# Altium PCB Hi-Fi.PcbDoc
Units mil, origin at the board's own origin, x right, y up, seen from the top; angles counter-clockwise.
Board outline 5000 x 4000 mil, 4 copper layers (Top Layer, Internal Plane 1, Internal Plane 2, Bottom Layer), stack 18.2 mil thick; 38 components, 33 nets, 94 pads, 6 vias.
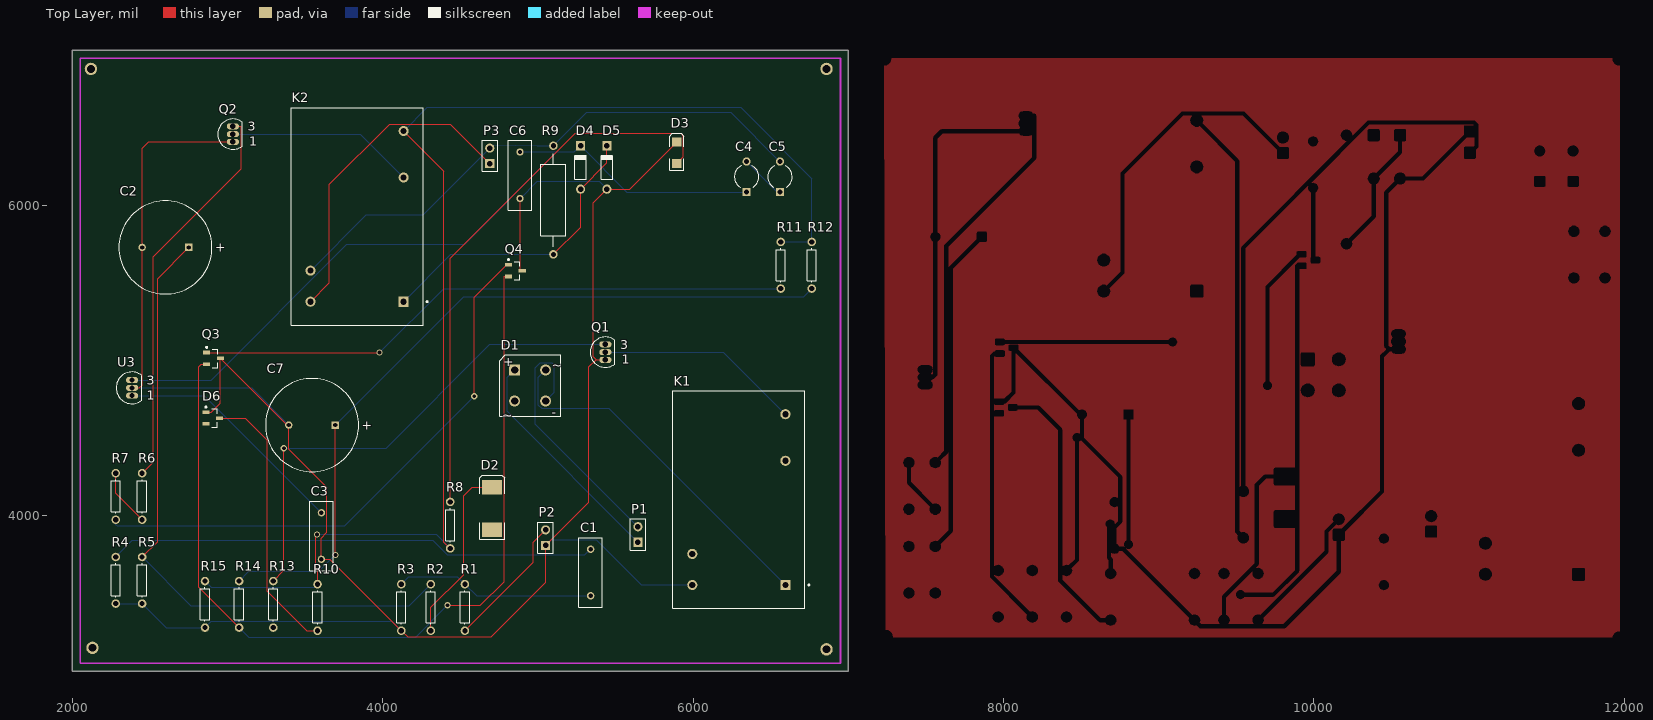
[diagram p0: Top Layer view]
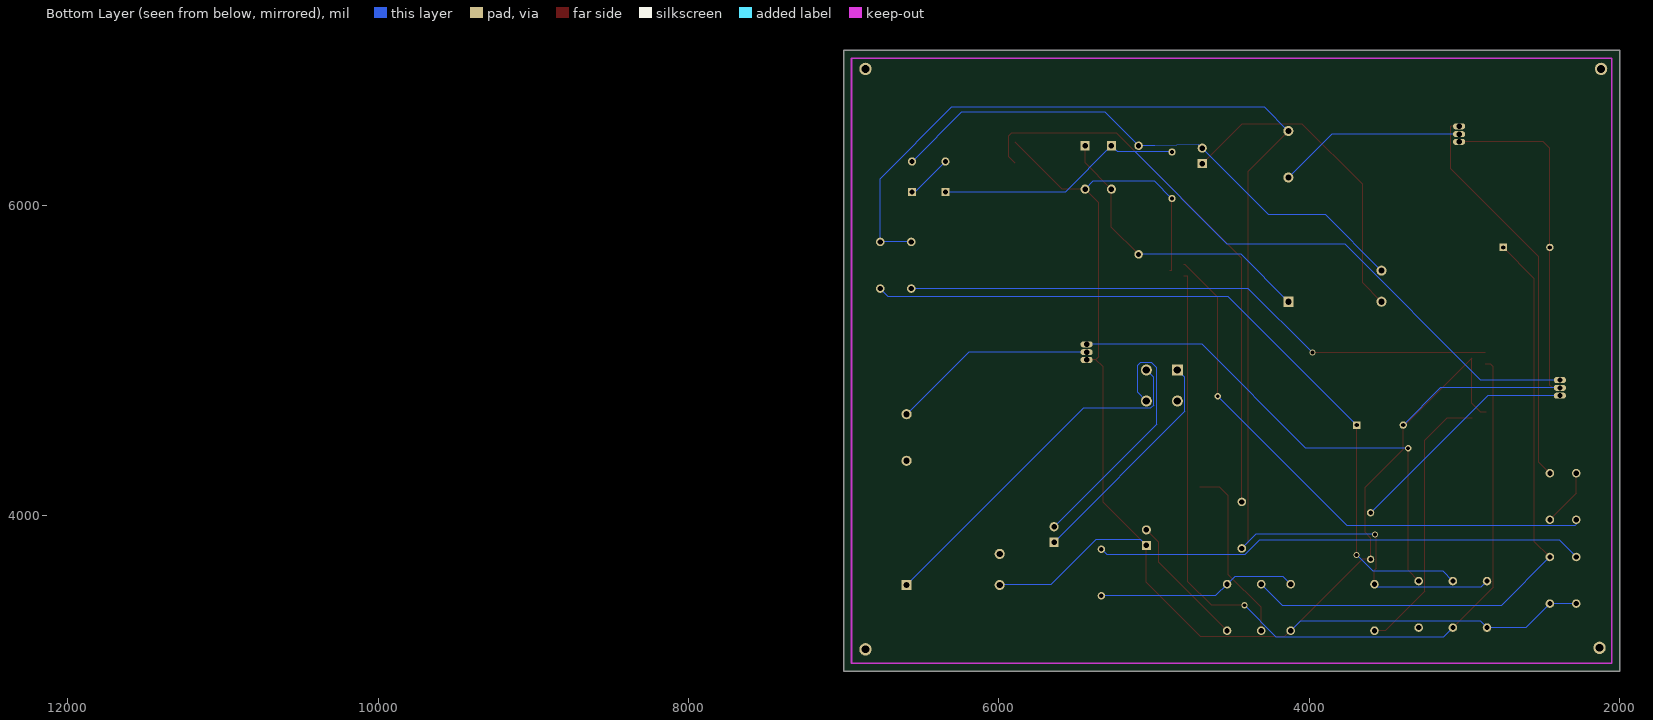
[diagram p1: Bottom Layer view, seen from below]
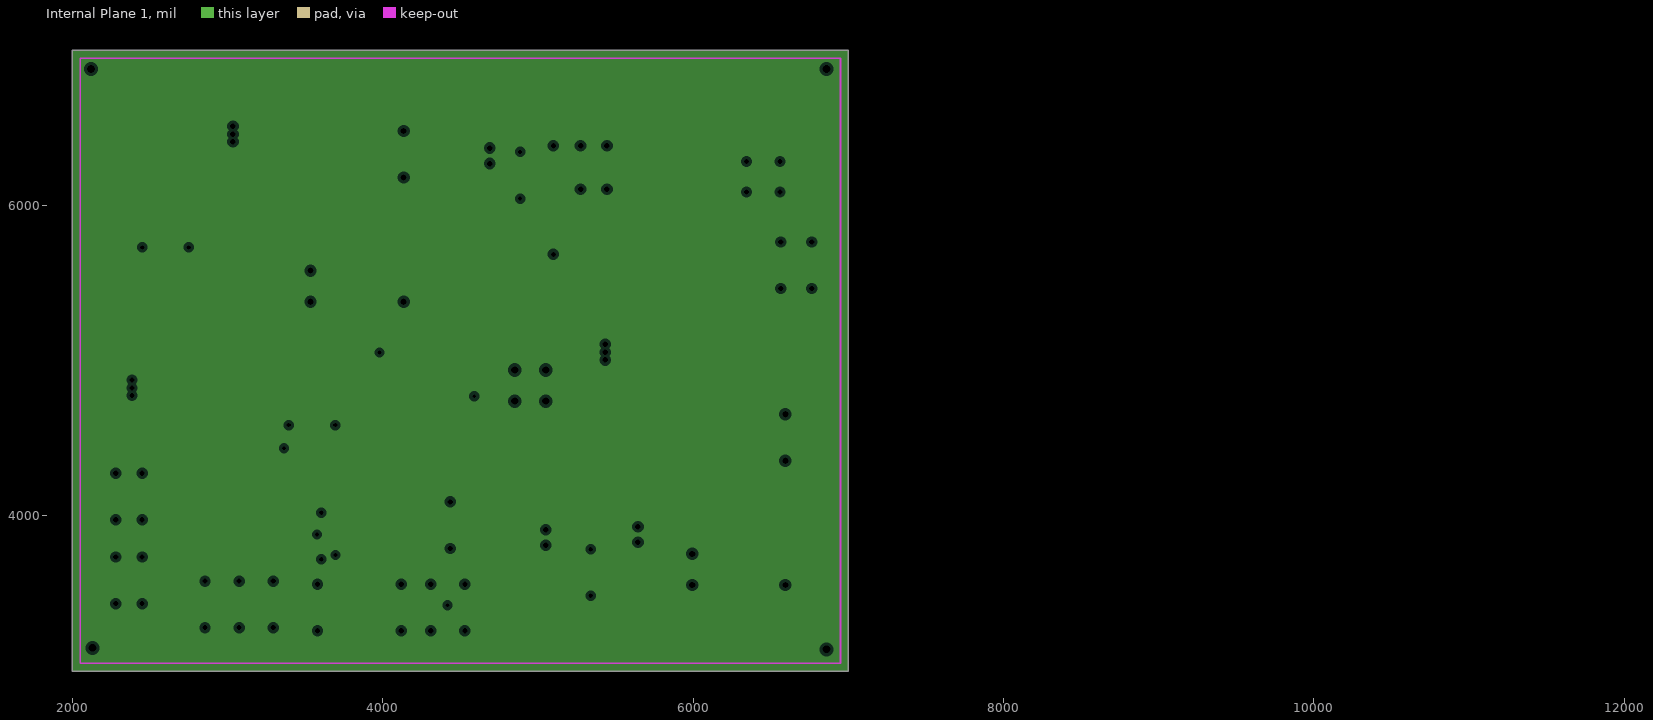
[diagram p2: Internal Plane 1, clearances drawn from the general rule]
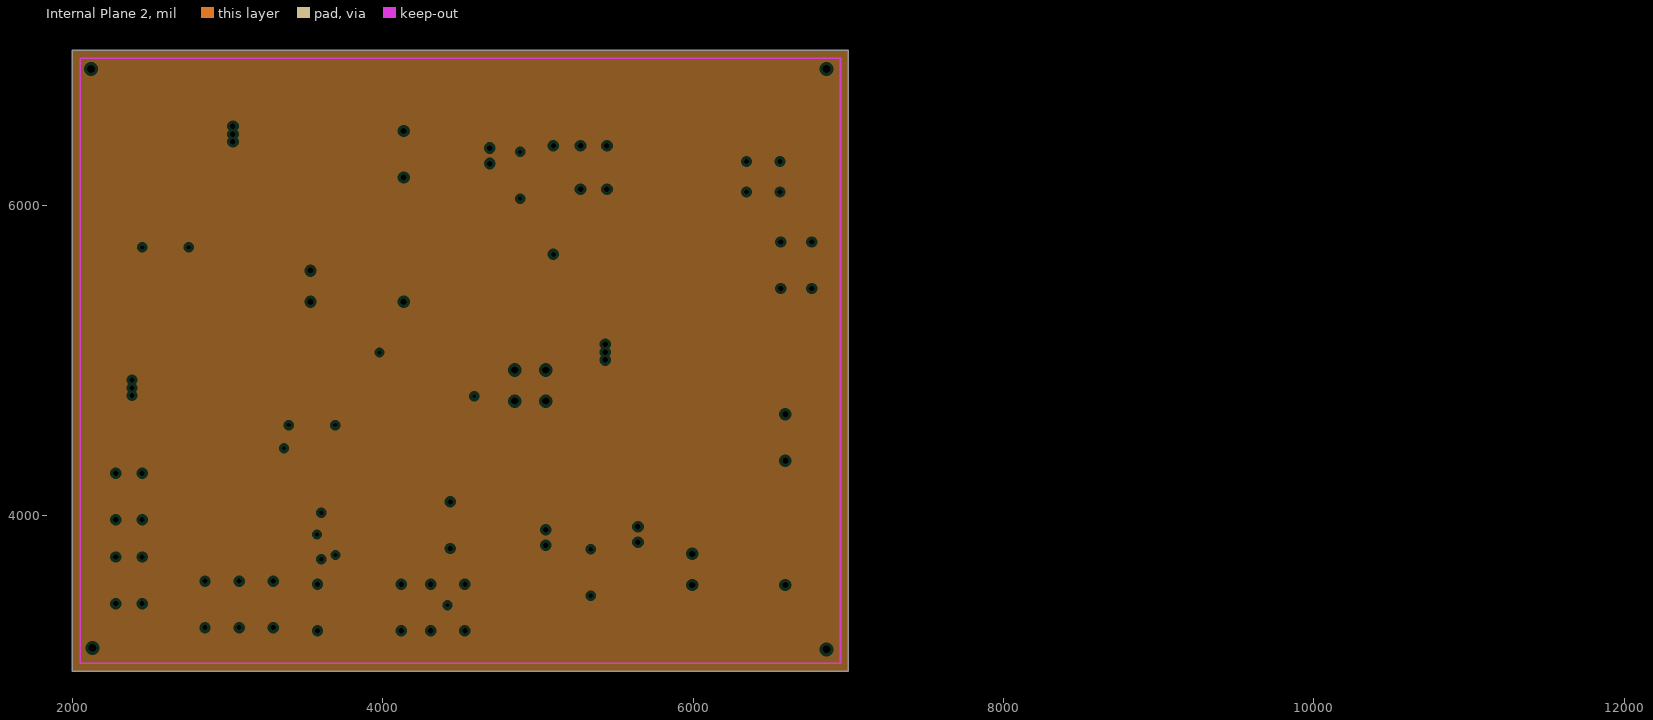
[diagram p3: Internal Plane 2, clearances drawn from the general rule]

## Layer stack, top to bottom
Top Solder: solder mask 0.4, Solder Resist, Dk 3.5
Top Layer: signal copper 1.4
Internal Plane 1: plane copper 1.4
Internal Plane 2: plane copper 1.4
Dielectric 1: dielectric 12.6, FR-4, Dk 4.8
Bottom Layer: signal copper 1.4
Bottom Solder: solder mask 0.4, Solder Resist, Dk 3.5

## Board outline
2000,3000 7000,3000 7000,7000 2000,7000

## Design rules (kind name [scope] priority, off if disabled: settings)
Clearance [All] p1: gap=8 ignorepadtopadclearanceinfootprint=FALSE
PlaneClearance [All] p1: clearance=20
PlaneConnect [All] p1: planeconnectstyle=Relief reliefexpansion=20 reliefentries=4 reliefconductorwidth=10 reliefairgap=10
PolygonConnect [All] p1: connectstyle=Relief reliefconductorwidth=10 reliefentries=4 polygonreliefangle="90 Angle" airgapwidth=10
RoutingVias [All] p1: holewidth=25 width=40 viastyle="Through Hole" minholewidth=28 minwidth=50 maxholewidth=28 maxwidth=50
SolderMaskExpansion [All] p1: expansion=4
Width [All] p1: maxlimit=8 minlimit=8 preferedwidth=8
28 further rules are at their usual default settings.

## Classes and differential pairs
component class "mini ": C7 D6 Q3 Q4 R10 R11 R12 R13 R14 R15 U4
component class mini6: C4 C5 C6 D4 D5 K2 P3 Q2 R9
component class mini5: C3 U3
component class mini4: D3 R6 R7 R8 U2
component class mini3: C1 C2 D2 P2 R1 R2 R3 R4 R5 U1
component class mini2: D1 K1 P1 Q1 V

## Components (designator, comment, footprint, x,y, rotation, side; value= is the part's Value field where it differs from the comment)
C1 "Cap" RAD-0.3 5340,3635 r90 top value=100pF
C2 "Cap Pol1" RB7.6-15 2600,5730 r0 top value=100pF
C3 "Cap" RAD-0.3 3605,3870 r90 top value=100pF
C4 "Cap2" CAPR5-4X5 6345,6185 r90 top value=100pF
C5 "Cap2" CAPR5-4X5 6560,6185 r90 top value=100pF
C6 "Cap" RAD-0.3 4885,6195 r90 top value=100pF
C7 "Cap Pol1" RB7.6-15 3545,4585 r0 top value=100uF
D1 "Bridge1" D-38 4950,4840 r0 top
D2 "Diode" SMC 4705,4048.19 r90 top
D3 "LED2" 3.2X1.6X1.1 5895,6340 r90 top
D4 "Diode 1N4448" DO-35 5275,6245 r90 top
D5 "Diode 1N4448" DO-35 5445,6245 r90 top
D6 "Diode BAS70" SOT-23_N 2905,4630 r0 top
K1 "Relay-SPDT" MODULE5B 6295,4105 r90 top
K2 "Relay-SPDT" MODULE5B 3835,5930 r90 top
P1 "Header 2" HDR1X2 5645,3830 r90 top
P2 "Header 2" HDR1X2 5050,3810 r90 top
P3 "Header 2" HDR1X2 4690,6270 r90 top
Q1 "BC368" TO-92A 5435,5055 r0 top
Q2 "BC368" TO-92A 3035,6460 r0 top
Q3 "BC807-16" SOT-23A_N 2910,5015 r0 top
Q4 "BC807-16" SOT-23A_N 4855,5580 r0 top
R1 "Res1" AXIAL-0.3 4530,3410 r90 top value=1K
R2 "Res1" AXIAL-0.3 4310,3410 r90 top value=1K
R3 "Res1" AXIAL-0.3 4120,3410 r90 top value=1K
R4 "Res1" AXIAL-0.3 2280,3585 r90 top value=1K
R5 "Res1" AXIAL-0.3 2450,3585 r90 top value=1K
R6 "Res1" AXIAL-0.3 2450,4125 r90 top value=47K
R7 "Res1" AXIAL-0.3 2280,4125 r90 top value=100K
R8 "Res1" AXIAL-0.3 4435,3940 r90 top value=1K
R9 "Res Adj1" AXIAL-0.7 5100,6035 r90 top value=1K
R10 "Res1" AXIAL-0.3 3580,3410 r90 top value=560K
R11 "Res1" AXIAL-0.3 6565,5615 r90 top value=100K
R12 "Res1" AXIAL-0.3 6765,5615 r90 top value=330K
R13 "Res1" AXIAL-0.3 3295,3430 r90 top value=22K
R14 "Res1" AXIAL-0.3 3075,3430 r90 top value=10K
R15 "Res1" AXIAL-0.3 2855,3430 r90 top value=10K
U3 "LM2931-5AQLP" LP03 2385,4825 r0 top

## Footprints (in the part's own frame and the unit in brackets; to place one, negate y for a bottom-side part, rotate by r counter-clockwise, add the part's x,y. Pads: shape width x height; smd on the part's side, far side on the other; paste and mask are expansions set on the pad)
3.2X1.6X1.1 [mm] "SMT LED; 2 Flat Leads"
  rect 1.5x1.5 smd: 1(-1.75,0) 2(1.75,0)
  silkscreen extent -2.9,-1.15 3.2,1.15
AXIAL-0.3 [mm] "Axial Device, Thru-Hole; 2 Leads; 0.3 in Pin Spacing"
  round 1.4 hole 0.85: 1(-3.81,0) 2(3.81,0)
  silkscreen extent -2.77,-0.76 2.77,0.76
AXIAL-0.7 [mm] "Axial Device, Thru-Hole; 2 Leads; 0.7 in Pin Spacing"
  round 1.4 hole 0.85: 1(-8.89,0) 2(8.89,0)
  silkscreen extent -7.62,-2.03 7.62,2.03
CAPR5-4X5 [mm] "Capacitor; 2 Leads"
  rect 1.35x1.35 hole 0.8: 1(-2.5,0)
  round 1.35 hole 0.8: 2(2.5,0)
  silkscreen extent -1.69,-2 1.82,2
D-38 [mm] "Bridge Rectifier; 4 Terminals; Body 9.4 x 9.4 mm (typ); Pitch 5.08 mm"
  rect 1.8x1.8 hole 1.2: 1(-2.54,2.54)
  round 1.8 hole 1.2: 2(-2.54,-2.54) 3(2.54,-2.54) 4(2.54,2.54)
  silkscreen extent -5,-5 5,5, body extent -5,-5 5,5, height 9.91
DO-35 [mm] "Diode, Axial; Body 3.8 x 1.9 mm (LxDia. max), Lead Dia. 0.53 mm (max)"
  round 1.5 hole 0.9: 1(-3.55,0)
  rect 1.5x1.5 hole 0.9: 2(3.55,0)
  silkscreen extent -1.95,-0.95 2.05,0.95
HDR1X2 [mm] "Connector; Header; 2 Position"
  rect 1.5x1.5 hole 0.9: 1(0,0)
  round 1.5 hole 0.9: 2(2.54,0)
  silkscreen extent -1.27,-1.27 3.81,1.27
LP03 [mm] "TO, Flat Index; 3 In-Line, Axial Leads; Body Dia. 4.8mm; Leads 0.56 x 0.41 mm (max)"
  oval 2x1 hole 0.8: 1(0,-1.27) 2(0,0) 3(0,1.27)
  silkscreen extent -2.6,-2.6 1.6,2.6
MODULE5B [mm] "DIP; 5 Round Pins; Row Space 15.24 mm; Pitch 2.54 mm"
  rect 1.65x1.65 hole 1: 1(-13.97,-7.62)
  round 1.65 hole 1: 2(-13.97,7.62) 3(-8.89,7.62) 4(13.97,-7.62) 5(6.35,-7.62)
  silkscreen extent -17.8,-11.58 17.8,10.8, body extent -17.8,-10.8 17.8,10.8, height 14
RAD-0.3 [mm] "Radial Cap, Thru-Hole; 2 Leads; 0.3 in Pin Spacing"
  round 1.2 hole 0.7: 1(-3.81,0) 2(3.81,0)
  silkscreen extent -5.71,-1.91 5.71,1.91
RB7.6-15 [mm] "Polarized Capacitor (Radial); 2 Leads"
  rect 1.2x1.2 hole 0.7: 1(3.81,0)
  round 1.2 hole 0.7: 2(-3.81,0)
  silkscreen extent -7.62,-7.62 7.62,7.62
SMC [mm] "DO-214-AB/SMC; 2 C-Bend Leads; Body 7.9 x 5.9 mm, inc. leads (LxW)"
  rect 2.4x3.3 smd: 1(-3.475,0) 2(3.475,0)
  silkscreen extent -5.07,-2.05 5.43,2.06
SOT-23_N [mm] "SOT23, 3-Leads, Body 2.9x1.3mm, Pitch 0.95mm, Lead Span 2.5mm, IPC Medium Density"
  rect 1.15x0.6 smd: 1(-1.125,0.95) 2(-1.125,-0.95) 3(1.125,0)
  silkscreen extent -1.25,-1.5 0.7,1.92, body extent -0.7,-1.5 0.7,1.5, height 1.1
SOT-23A_N [mm] "SOT23, 3-Leads, Body 2.9x1.3mm, Pitch 0.95mm, Lead Span 2.3mm, IPC Medium Density"
  rect 1.15x0.6 smd: 1(-1.125,0.95) 2(-1.125,-0.95) 3(1.125,0)
  silkscreen extent -1.25,-1.5 0.7,1.92, body extent -0.7,-1.5 0.7,1.5, height 1.09
TO-92A [mm] "TO, Flat Index; 3 In-Line, Axial Leads; Body Dia. 4.5mm; Leads 0.51 x 0.48 mm (max)"
  oval 2x1 hole 0.9: 1(0,-1.27) 2(0,0) 3(0,1.27)
  silkscreen extent -2.48,-2.48 1.5,2.48

## Part data
C1 C3 C4 C5 C6: "Capacitor", Publisher="Altium Limited"
  C1 C3 C6: LatestRevisionDate=17-Jul-2002, LatestRevisionNote="Re-released for DXP Platform.", PackageDescription="Radial Cap, Thru-Hole; 2 Leads; 0.3 in Pin Spacing", PackageReference=RAD-0.3, Published=8-Jun-2000
  C4 C5: PackageDescription="Capacitor; 2 Leads", PackageReference=CAPR5-4X5, Published=23-Sep-2002
C2 C7: "Polarized Capacitor (Radial)", LatestRevisionDate=17-Jul-2002, LatestRevisionNote="Re-released for DXP Platform.", PackageDescription="Polarized Capacitor (Radial); 2 Leads", PackageReference=RB7.6-15, Published=8-Jun-2000, Publisher="Altium Limited"
D1: "Full Wave Diode Bridge", DatasheetVersion=E2732B, LatestRevisionDate=29-May-2009, LatestRevisionNote="Sch pins A & K swapped.", PackageDescription="Bridge Rectifier; 4 Terminals; Body 9.4 x 9.4 mm (typ); Pitch 5.08 mm", PackageReference=D-38, Published=8-Jun-2000, Publisher="Altium Limited"
D2: "Default Diode", Code_JEDEC=DO-214-AB, LatestRevisionDate=17-Jul-2002, LatestRevisionNote="Re-released for DXP Platform.", PackageDescription="DO-214-AB/SMC; 2 C-Bend Leads; Body 7.9 x 5.9 mm, inc. leads (LxW)", PackageReference=SMC, PackageVersion=Sep-1996, Published=8-Jun-2000, Publisher="Altium Limited"
D3: "Typical RED, GREEN, YELLOW, AMBER GaAs LED", LatestRevisionDate=17-Jul-2002, LatestRevisionNote="Re-released for DXP Platform.", PackageDescription="SM LED; 2 Flat Leads", PackageReference=3.2X1.6X1.1, PackageVersion=Feb-2002, Published=8-Jun-2000, Publisher="Altium Limited"
D4 D5: "High Conductance Fast Diode", Code_JEDEC=DO-204-AH, ComponentLink1Description="Manufacturer Link", ComponentLink1URL=http://www.fairchildsemi.com/, ComponentLink2Description=Datasheet, ComponentLink2URL=http://www.fairchildsemi.com/ds/1N%2F1N4448.pdf, DatasheetVersion=1997, LatestRevisionDate=17-Jul-2002, LatestRevisionNote="Re-released for DXP Platform.", PackageDescription="Diode, Axial; Body 3.8 x 1.9 mm (LxDia. max), Lead Dia. 0.53 mm (max)", PackageReference=DO-35, Published=8-Jun-2000, Publisher="Altium Limited"
D6: "Silicon AF Schottky Diode for High-Speed Switching", ComponentLink1Description="Manufacturer Link", ComponentLink1URL=http://www.infineon.com/, ComponentLink2Description=Datasheet, ComponentLink2URL=http://www.infineon.com/upload/Document/cmc_upload/documents/009/382/bas40_bas140series_1.pdf, DatasheetVersion=Oct-1999, LatestRevisionDate=29-May-2009, LatestRevisionNote="IPC-7351 Footprint Added.", Note="Pin 2 is not connected and not drawn.", PackageDescription="3-Pin SOT-23 Package 0.95 mm Pitch, 2.5 mm Lead Span", PackageReference=SOT-23, PackageVersion=Sep-2001, Published=21-Mar-2003, Publisher="Altium Limited"
K1 K2: "Single-Pole Dual-Throw Relay", LatestRevisionDate=17-Jul-2002, LatestRevisionNote="Re-released for DXP Platform.", PackageReference=MODULE5B, Published=24-Mar-1999, Publisher="Altium Limited"
P1 P2 P3: "Header, 2-Pin", LatestRevisionDate=17-Jul-2002, LatestRevisionNote="Re-released for DXP Platform.", Publisher="Altium Limited"
Q1 Q2: "NPN General Purpose Amplifier", ComponentLink1Description="Manufacturer Link", ComponentLink1URL=http://www.fairchildsemi.com/, ComponentLink2Description=Datasheet, ComponentLink2URL=http://www.fairchildsemi.com/ds/BC%2FBC368.pdf, DatasheetVersion=1997, LatestRevisionDate=17-Jan-2003, LatestRevisionNote="PCB Footprint replaced", PackageDescription="TO, Flat Index; 3 In-Line, Axial Leads; Body Dia. 4.5mm; Leads 0.51 x 0.48 mm (max)", PackageReference=TO-92A, PackageVersion=Sep-1998, Published=8-Jun-2000, Publisher="Altium Limited"
Q3 Q4: "PNP General Purpose Amplifier", ComponentLink1Description="Manufacturer Link", ComponentLink1URL=http://www.fairchildsemi.com/, ComponentLink2Description=Datasheet, ComponentLink2URL=http://www.fairchildsemi.com/ds/BC%2FBC807.pdf, DatasheetVersion=1997, LatestRevisionDate=20-Nov-2009, LatestRevisionNote="IPC-7351 Footprint Added.", PackageDescription="3-Pin SOT-23 Package 0.95 mm Pitch, 2.3 mm Lead Span", PackageReference=SOT-23A, PackageVersion=Sep-1998, Published=8-Jun-2000, Publisher="Altium Limited"
R1 R2 R3 R4 R5 R6 R7 R8 R10 R11 R12 R13 R14 R15: "Resistor", LatestRevisionDate=17-Jul-2002, LatestRevisionNote="Re-released for DXP Platform.", PackageDescription="Axial Device, Thru-Hole; 2 Leads; 0.3 in Pin Spacing", PackageReference=AXIAL-0.3, Published=8-Jun-2000, Publisher="Altium Limited"
R9: "Variable Resistor", LatestRevisionDate=17-Jul-2002, LatestRevisionNote="Re-released for DXP Platform.", PackageDescription="Axial Device, Thru-Hole; 2 Leads; 0.7 in Pin Spacing", PackageReference=AXIAL-0.7, Published=8-Jun-2000, Publisher="Altium Limited", Set Position=0.5
U3: "3-Terminal Positive Voltage Regulator", Code_JEDEC=TO-226-AA, ComponentLink1Description="Manufacturer Link", ComponentLink1URL=http://www.ti.com/, DatasheetVersion=Oct-1988, PackageDescription="TO, Flat Index; 3 In-Line, Axial Leads; Body Dia. 4.8mm; Leads 0.56 x 0.41 mm (max)", PackageReference=LP03, PackageVersion=Nov-2001, Published=15-Apr-2002, Publisher="Altium Limited"

## Free pads (board coordinates)
  round 80 hole 50: 1(2120,6880) 2(6860,6880) 3(6860,3140) 4(2130,3150)

## Via types
v1: diameter 40, hole 25, Top Layer to Bottom Layer, 6 vias

## Nets (pads, with @x,y where several pads share a name; then routed paths per layer and width w, separated by ;. In a path a pad name is that pad's centre, name@x,y a point inside that pad or via, vN(x,y) a via of type N, cw(c..) or ccw(c..) an arc to the next point about the centre after c; other vN are vias at no path point)
GND: C2.2 C3.1 C6.1 C7.2 D3.2 D5.1 D6.1 K1.2 P2.1 Q1.1 Q2.1 Q3.3 Q4.3 R3.1 R4.1 R5.1 R15.1 U3.2 | length 14600
  Top Layer w8: U3.2 2432,4825 2450,4843 C2.2 2450,6368 2492,6410 Q2.1 ; D6.1 2895,4667.4 2954.29,4726.69 Q3.3 C7.2@3395,4574.29 ; C7.2 C7.2@3395,4574.29 ; C6.1 4885,5580 Q4.3 ; Q1.1 5375,5005 ; D3.2 5591.34,6105.24 D5.1 5356,6016.24 5356,5024 5375,5005 ; C7.2@3395,4574.29 3395,4430 3641,4184 3641,3893 3605,3857 C3.1 3660,3720 R3.1 4160,3220 4698,3220 5050,3572 P2.1 5328,4088 5328,4960 5375,5005
  Bottom Layer w8: R4.1 R5.1 2605,3280 R15.1 2896,3321 4059,3321 R3.1 ; U3.2 3155,4825 C7.2 ; C6.1 4995,6155 5395.24,6155 D5.1 ; P2.1 5086,3846 5376,3846 5667,3555 K1.2
NetC1_1: C1.1 R1.2 R3.2 | length 1291.7
  Bottom Layer w8: R3.2 4169,3609 4481,3609 R1.2 4605,3485 C1.1
NetC1_2: C1.2 R4.2 | length 3158.6
  Bottom Layer w8: R4.2 2387,3842 4322,3842 4416,3748 5303,3748 C1.2
NetC2_1: C2.1 R2.2 R5.2 | length 4166.9
  Top Layer w8: R5.2 2549,3834 2549,5529 C2.1
  Bottom Layer w8: R5.2 2764,3421 4171,3421 R2.2
NetC3_2: C3.2 U3.1 | length 1532.7
  Bottom Layer w8: U3.1 2850,4775 C3.2
NetC4_1: C4.1 C6.2 D4.2 U3.3 | length 4947.1
  Bottom Layer w8: U3.3 2895,4875 3769,5749 4527.24,5749 5123.24,6345 ; C6.2 5123.24,6345 ; C4.1 5573.19,6086.57 D4.2 5235.24,6345 5123.24,6345
NetC4_2: C4.2 C5.1 | length 296.5
  Bottom Layer w8: C4.2 6541.85,6086.57 C5.1
NetC5_2: C5.2 K2.3 P3.2 R9.2 | length 3581.4
  Bottom Layer w8: K2.3 3895,5940 4260,5940 P3.2 4711,6391 4995,6385 R9.2 5315.27,6600.27 6243.16,6600.27 C5.2
NetC7_1: C7.1 R12.1 R14.2 | length 4961.1
  Top Layer w8: v1(3695,3748) C7.1
  Bottom Layer w8: R14.2 3137,3642 3589,3642 v1(3695,3748) ; C7.1 4522,5412 6712,5412 R12.1
NetD1_1: D1.1 P1.1 | length 1479.1
  Bottom Layer w8: D1.1 4802,4892 4802,4673 P1.1
NetD1_2: D1.2
NetD1_3: D1.3 P1.2 | length 1695.3
  Bottom Layer w8: D1.3 5106.43,4796.43 5106.43,4969.01 5088,4987.43 5015.43,4987.43 4984,4956 4984,4591 P1.2
NetD1_4: D1.4 K1.1 | length 2318.2
  Bottom Layer w8: D1.4 5002.57,4892.57 5002.57,4714 5024,4692.57 5457.43,4692.57 K1.1
NetD2_1: D2.1
NetD2_2: D2.2 R2.1 | length 1164.2
  Top Layer w8: R2.1 4310,3410 4521,3621 4521,4130 4576,4185 D2.2
NetD3_1: D3.1 R8.2 | length 3609.6
  Top Layer w8: R8.2 4435,5660 5242,6467 5920,6467 5937,6450 5937,6313.1 D3.1
NetD4_1: D4.1 D5.2 K2.1 R9.1 | length 1934
  Top Layer w8: R9.1 5275,5860 D4.1 5445,6275.24 D5.2
  Bottom Layer w8: K2.1 4440,5685 R9.1
NetD6_3: D6.3 R10.1 | length 1768.2
  Top Layer w8: D6.3 3113,4630 3255,4488 3255,3515 3510,3260 R10.1
NetK1_3: K1.3
NetK1_4: K1.4 Q1.2 | length 1325.7
  Bottom Layer w8: Q1.2 6195,5055 K1.4
NetK1_5: K1.5
NetK2_2: K2.2 P3.1 | length 2107.5
  Top Layer w8: K2.2 3656,5501 3656,6137 4044,6525 4435,6525 P3.1
NetK2_4: K2.4 R8.1 R10.2 R11.2 R12.2 R15.2 | length 8278.4
  Top Layer w8: v1(3577,3880) 3569,3872 3569,3662 3580,3651 R10.2 ; K2.4 4395,6220 4395,3830 R8.1
  Bottom Layer w8: R15.2 2895,3540 3560,3540 R10.2 ; v1(3577,3880) 4345,3880 R8.1 ; K2.4 4287,6632 6306,6632 6765,6173 R12.2 R11.2
NetK2_5: K2.5 Q2.2 | length 1216
  Bottom Layer w8: Q2.2 3855,6460 K2.5
NetP2_2: P2.2 R1.1 | length 865.4
  Top Layer w8: R1.1 4971,3701 4971,3831 P2.2
NetQ1_3: Q1.3 R13.2 | length 3233.3
  Top Layer w8: R13.2 3363,3648 v1(3363,4436)
  Bottom Layer w8: v1(3363,4436) 4022,4436 4691,5105 Q1.3
NetQ2_3: Q2.3 R6.2 | length 2550.9
  Top Layer w8: R6.2 2520,4345 2520,5670 3087,6237 3087,6510 Q2.3
NetQ3_1: Q3.1 R11.1 | length 3870.2
  Top Layer w8: Q3.1 v1(3979.4,5052.4)
  Bottom Layer w8: v1(3979.4,5052.4) 4392,5465 R11.1
NetQ3_2: Q3.2 Q4.2 R14.1 | length 5720.9
  Top Layer w8: Q3.2 2832,4977.6 2815,4960.6 2815,3540 R14.1 ; v1(4417,3424) 4629,3424 4782,3577 4782,5542.6 Q4.2
  Bottom Layer w8: R14.1 3136,3219 4212,3219 v1(4417,3424)
NetQ4_1: Q4.1 R7.1 | length 3635.1
  Top Layer w8: v1(4590,4771) 4590,5407.4 4800,5617.4 Q4.1
  Bottom Layer w8: R7.1 2280,3944 2289,3935 3754,3935 v1(4590,4771)
NetR6_1: R6.1 R7.2 | length 370.4
  Top Layer w8: R7.2 2280,4145 R6.1
NetR13_1: R13.1
NetU4_1: 
pads on no net: D6.2

## Polygon pours and split planes (outlines as drawn)
no net on Top Layer "Top Layer-No Net" (solid, pour order 0): 7231.06,6948.36 11971.06,6948.36 11971.06,3208.36 11961.06,3218.36 7241.06,3218.36

## Keep-outs
Keep-Out Layer:
  lines w10: 2050,3050 2050,6950 6950,6950 6950,3050 2050,3050

## Dimensions
2050,3050 to 2050,6950 on Mechanical 1
2050,3050 to 6950,3050 on Mechanical 1

## Text inside footprints (layer, text, board x,y; h text height)
C2: Top Overlay "+" at 2920.15,5700.99 h59.06
C7: Top Overlay "+" at 3865.15,4555.99 h59.06
D1: Top Overlay "+" at 4776.38,4964.57 h59.06; Top Overlay "-" at 5090,4640 h59.05; Top Overlay "~" at 4770,4620 h59.05; Top Overlay "~" at 5090,4940 h59.05
Q1: Top Overlay "1" at 5539.72,4980.2 h59.05; Top Overlay "3" at 5530.67,5075.08 h59.05
Q2: Top Overlay "1" at 3139.72,6385.2 h59.05; Top Overlay "3" at 3130.67,6480.08 h59.05
U3: Top Overlay "1" at 2480.32,4747.09 h59.05; Top Overlay "3" at 2480.32,4843.39 h59.05